# EAGLE board eg3301_pcb v11 (EAGLE 9.7.0)
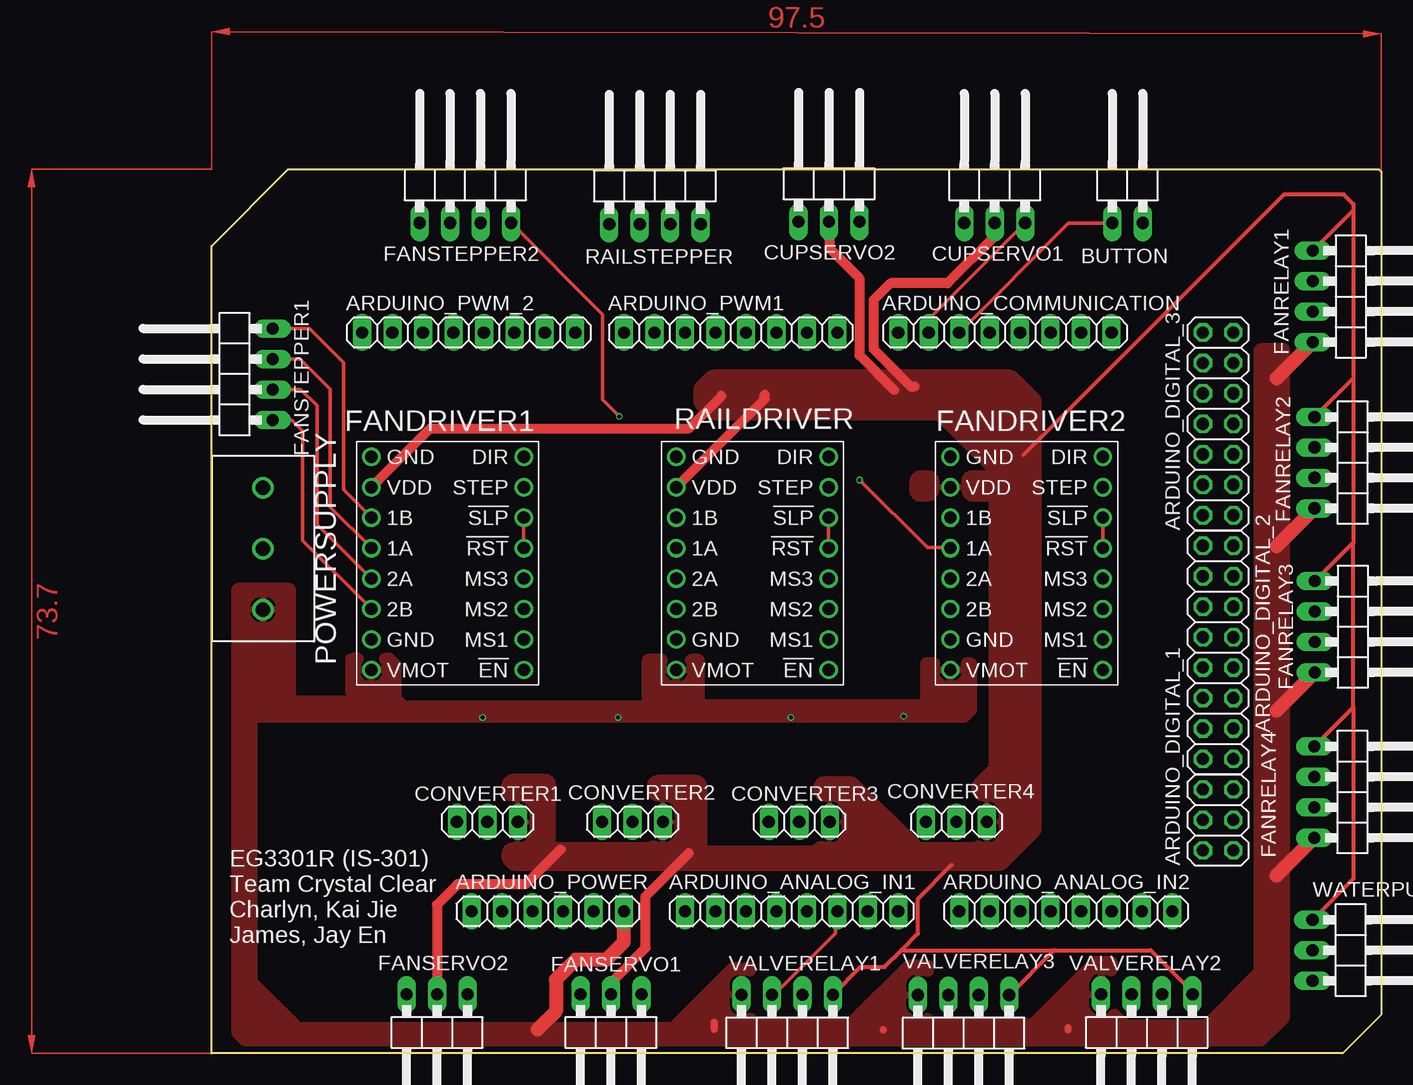
[diagram p0: board, top side]
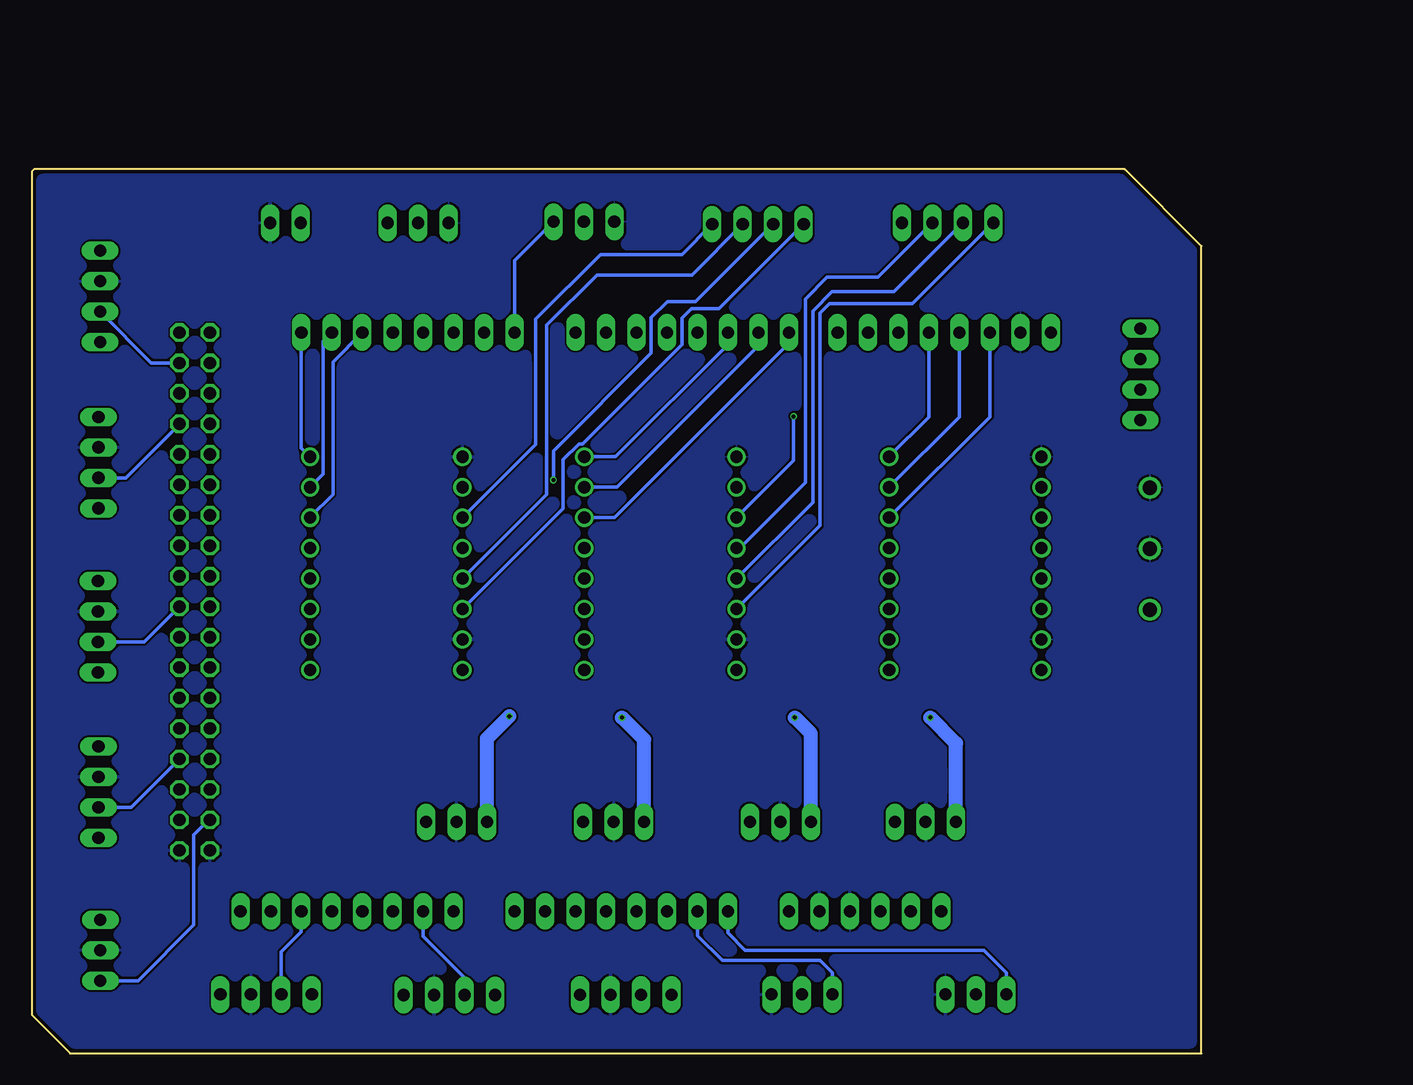
[diagram p1: board, bottom side, seen from below]

Size 97.5 x 73.7 mm. Coordinates in mm from the lower left corner, seen from the top.
Outline: 97.5,73.5 97.5,3.2 94.3,0 0,0 0,67.3 6.4,73.7 97.3,73.7 97.5,73.5
Copper layers (1*16): Top / Bottom
Stack-up Default Layer Stack: Top User Defined 0.035mm / Dielectric-1 User Defined 1.5mm / Bottom User Defined 0.035mm
Design rules: minimum copper width 6mil, minimum drill size 0.3mm, copper clearance wire_polygon to wire_polygon 6mil, copper clearance wire_polygon to pad_smd 6mil, copper clearance wire_polygon to via 6mil, copper clearance pad_smd to pad_smd 6mil, copper clearance pad_smd to via 6mil, copper clearance via to via 6mil, copper clearance smd to pad (same net) 0mil, copper clearance smd to via (same net) 0mil, copper clearance smd to smd (same net) 0mil, dimension clearance 0.3mm, via restrict clearance 0mil, restrict clearance 0mil, drill distance 10mil, keepout clearance 0mil

## Footprints (pad centres in the part's own frame; a part is rotated, then mirrored left to right if it is on the bottom)
1X08 = drill 1.016 long: 1 -8.89,0; 2 -6.35,0; 3 -3.81,0; 4 -1.27,0; 5 1.27,0; 6 3.81,0; 7 6.35,0; 8 8.89,0
2X03 = drill 1.016 octagon: 1 -2.54,-1.27; 2 -2.54,1.27; 3 0,-1.27; 4 0,1.27; 5 2.54,-1.27; 6 2.54,1.27
2X08 = drill 1.016 octagon: 1 -8.89,-1.27; 2 -8.89,1.27; 3 -6.35,-1.27; 4 -6.35,1.27; 5 -3.81,-1.27; 6 -3.81,1.27; 7 -1.27,-1.27; 8 -1.27,1.27; 9 1.27,-1.27; 10 1.27,1.27; 11 3.81,-1.27; 12 3.81,1.27; 13 6.35,-1.27; 14 6.35,1.27; 15 8.89,-1.27; 16 8.89,1.27
2X07 = drill 1.016 octagon: 1 -7.62,-1.27; 2 -7.62,1.27; 3 -5.08,-1.27; 4 -5.08,1.27; 5 -2.54,-1.27; 6 -2.54,1.27; 7 0,-1.27; 8 0,1.27; 9 2.54,-1.27; 10 2.54,1.27; 11 5.08,-1.27; 12 5.08,1.27; 13 7.62,-1.27; 14 7.62,1.27
1X06 = drill 1.016 long: 1 -6.35,0; 2 -3.81,0; 3 -1.27,0; 4 1.27,0; 5 3.81,0; 6 6.35,0
1X02/90 = drill 1.016 long: 1 -1.27,-3.81; 2 1.27,-3.81
1X03 = drill 1.016 long: 1 -2.54,0; 2 0,0; 3 2.54,0
1X03/90 = drill 1.016 long: 1 -2.54,-3.81; 2 0,-3.81; 3 2.54,-3.81
A4988 = drill 1.016: 1 -6.35,8.89; 2 -6.35,6.35; 3 -6.35,3.81; 4 -6.35,1.27; 5 -6.35,-1.27; 6 -6.35,-3.81; 7 -6.35,-6.35; 8 -6.35,-8.89; 9 6.35,-8.89; 10 6.35,-6.35; 11 6.35,-3.81; 12 6.35,-1.27; 13 6.35,1.27; 14 6.35,3.81; 15 6.35,6.35; 16 6.35,8.89
1X04/90 = drill 1.016 long: 1 -3.81,-3.81; 2 -1.27,-3.81; 3 1.27,-3.81; 4 3.81,-3.81
TERMBLK_508-3N = drill 1.2: 1 0,0; 2 5.08,0; 3 10.16,0

## Placement (x,y rotation side)
ARDUINO_ANALOG_IN1  PINHD-1X8  [1X08]  48.36,11.84 0 top
ARDUINO_ANALOG_IN2  PINHD-1X8  [1X08]  71.22,11.84 0 top
ARDUINO_COMMUNICATION  PINHD-1X8  [1X08]  66.14,60.1 0 top
ARDUINO_DIGITAL_1  PINHD-2X3  [2X03]  83.92,19.46 90 top
ARDUINO_DIGITAL_2  PINHD-2X8  [2X08]  83.92,33.43 90 top
ARDUINO_DIGITAL_3  PINHD-2X7  [2X07]  83.92,52.48 90 top
ARDUINO_POWER  PINHD-1X6  [1X06]  28.04,11.84 0 top
ARDUINO_PWM1  PINHD-1X8  [1X08]  43.28,60.1 0 top
ARDUINO_PWM_2  PINHD-1X8  [1X08]  21.43,60.1 0 top
BUTTON  PINHD-1X2/90  [1X02/90]  76.36,73.04 0 top
CONVERTER1  PINHD-1X3  [1X03]  23,19.3 0 top
CONVERTER2  PINHD-1X3  [1X03]  35.1,19.3 0 top
CONVERTER3  PINHD-1X3  [1X03]  49,19.3 0 top
CONVERTER4  PINHD-1X3  [1X03]  62.1,19.3 0 top
CUPSERVO1  PINHD-1X3/90  [1X03/90]  65.29,73.04 0 top
CUPSERVO2  PINHD-1X3/90  [1X03/90]  51.48,73.14 0 top
FANDRIVER1  1182-A4988  [A4988]  19.68,40.85 180 top
FANDRIVER2  1182-A4988  [A4988]  67.95,40.85 180 top
FANRELAY1  PINHD-1X4/90  [1X04/90]  95.62,63.1 270 top
FANRELAY2  PINHD-1X4/90  [1X04/90]  95.76,49.25 270 top
FANRELAY3  PINHD-1X4/90  [1X04/90]  95.79,35.57 270 top
FANRELAY4  PINHD-1X4/90  [1X04/90]  95.75,21.78 270 top
FANSERVO1  PINHD-1X3/90  [1X03/90]  33.3,1.1 180 top
FANSERVO2  PINHD-1X3/90  [1X03/90]  18.8,1.1 180 top
FANSTEPPER1  PINHD-1X4/90  [1X04/90]  1.28,56.62 90 top
FANSTEPPER2  PINHD-1X4/90  [1X04/90]  21.16,73.05 0 top
POWERSUPPLY  2828XX-3282837-3  [TERMBLK_508-3N]  4.3,37 90 top
RAILDRIVER  1182-A4988  [A4988]  45.1,40.85 180 top
RAILSTEPPER  PINHD-1X4/90  [1X04/90]  36.97,72.94 0 top
VALVERELAY1  PINHD-1X4/90  [1X04/90]  47.99,1.08 180 top
VALVERELAY2  PINHD-1X4/90  [1X04/90]  77.97,1.1 180 top
VALVERELAY3  PINHD-1X4/90  [1X04/90]  62.69,1.05 180 top
WATERPUMPRELAY  PINHD-1X3/90  [1X03/90]  95.6,8.6 270 top

## Library data of the parts
ARDUINO_ANALOG_IN1 ARDUINO_ANALOG_IN2 ARDUINO_COMMUNICATION ARDUINO_PWM1 ARDUINO_PWM_2 = Connector; CATEGORY: Headers; DESCRIPTION: Header, Straight, 8 Position; MANUFACTURER: Generic; MPN: Generic; OPERATING_TEMPERATURE: Generic; PART_STATUS: Active; PITCH: 0.100" (2.54mm); ROHS_COMPLIANCE: Generic; SERIES: Generic; SUB-CATEGORY: Headers, Male Pins; TYPE: Board to Board or Cable, Unshrouded, Through Hole, Straight
ARDUINO_DIGITAL_1 = Connector; CATEGORY: Headers; DESCRIPTION: Header, Straight, 2x3 Position; MANUFACTURER: Generic; MPN: Generic; OPERATING_TEMPERATURE: Generic; PART_STATUS: Active; PITCH: 0.100" (2.54mm); ROHS_COMPLIANCE: Generic; SERIES: Generic; SUB-CATEGORY: Headers, Male Pins; TYPE: Board to Board or Cable, Unshrouded, Through Hole, Straight
ARDUINO_DIGITAL_2 = Connector; CATEGORY: Headers; DESCRIPTION: Header, Straight, 2x8 Position; MANUFACTURER: Generic; MPN: Generic; OPERATING_TEMPERATURE: Generic; PART_STATUS: Active; PITCH: 0.100" (2.54mm); ROHS_COMPLIANCE: Generic; SERIES: Generic; SUB-CATEGORY: Headers, Male Pins; TYPE: Board to Board or Cable, Unshrouded, Through Hole, Straight
ARDUINO_DIGITAL_3 = Connector; CATEGORY: Headers; DESCRIPTION: Header, Straight, 2x7 Position; MANUFACTURER: Generic; MPN: Generic; OPERATING_TEMPERATURE: Generic; PART_STATUS: Active; PITCH: 0.100" (2.54mm); ROHS_COMPLIANCE: Generic; SERIES: Generic; SUB-CATEGORY: Headers, Male Pins; TYPE: Board to Board or Cable, Unshrouded, Through Hole, Straight
ARDUINO_POWER = Connector; CATEGORY: Headers; DESCRIPTION: Header, Straight, 6 Position; MANUFACTURER: Generic; MPN: Generic; OPERATING_TEMPERATURE: Generic; PART_STATUS: Active; PITCH: 0.100" (2.54mm); ROHS_COMPLIANCE: Generic; SERIES: Generic; SUB-CATEGORY: Headers, Male Pins; TYPE: Board to Board or Cable, Unshrouded, Through Hole, Straight
BUTTON = Connector; CATEGORY: Headers; DESCRIPTION: Header, Right Angle, 2 Position; MANUFACTURER: Generic; MPN: Generic; OPERATING_TEMPERATURE: Generic; PART_STATUS: Active; PITCH: 0.100" (2.54mm); ROHS_COMPLIANCE: Generic; SERIES: Generic; SUB-CATEGORY: Headers, Male Pins; TYPE: Board to Board or Cable, Unshrouded, Through Hole, Right Angle
CONVERTER1-CONVERTER4 = Connector; CATEGORY: Headers; DESCRIPTION: Header, Straight, 3 Position; MANUFACTURER: Generic; MPN: Generic; OPERATING_TEMPERATURE: Generic; PART_STATUS: Active; PITCH: 0.100" (2.54mm); ROHS_COMPLIANCE: Generic; SERIES: Generic; SUB-CATEGORY: Headers, Male Pins; TYPE: Board to Board or Cable, Unshrouded, Through Hole, Straight
CUPSERVO1 CUPSERVO2 FANSERVO1 FANSERVO2 WATERPUMPRELAY = Connector; CATEGORY: Headers; DESCRIPTION: Header, Right Angle, 3 Position; MANUFACTURER: Generic; MPN: Generic; OPERATING_TEMPERATURE: Generic; PART_STATUS: Active; PITCH: 0.100" (2.54mm); ROHS_COMPLIANCE: Generic; SERIES: Generic; SUB-CATEGORY: Headers, Male Pins; TYPE: Board to Board or Cable, Unshrouded, Through Hole, Right Angle
FANDRIVER1 FANDRIVER2 RAILDRIVER = pololu-stepper-driver
FANRELAY1-FANRELAY4 FANSTEPPER1 FANSTEPPER2 RAILSTEPPER VALVERELAY1-VALVERELAY3 = Connector; CATEGORY: Headers; DESCRIPTION: Header, Right Angle, 4 Position; MANUFACTURER: Generic; MPN: Generic; OPERATING_TEMPERATURE: Generic; PART_STATUS: Active; PITCH: 0.100" (2.54mm); ROHS_COMPLIANCE: Generic; SERIES: Generic; SUB-CATEGORY: Headers, Male Pins; TYPE: Board to Board or Cable, Unshrouded, Through Hole, Right Angle
POWERSUPPLY = Connector; CATEGORY: Connector; DESCRIPTION: TERM BLK 3P SIDE ENT 5.08mm PCB; MANUFACTURER: TE Connectivity; MPN: 282837-3; OPERATING_TEMPERATURE: -40°C to +105°C; PART_STATUS: Active; PITCH: 0.200" (5.08mm); ROHS_COMPLIANCE: RoHS Compliant; SERIES: Buchanan; SUBCATEGORY: Terminal Block; TYPE: Side Wire Entry

## Nets
1A_1: FANDRIVER1.12 FANSTEPPER1.3
1A_2: FANSTEPPER2.3 RAILDRIVER.12
1A_3: FANDRIVER2.12 RAILSTEPPER.2
1B_1: FANDRIVER1.11 FANSTEPPER1.4
1B_2: FANSTEPPER2.4 RAILDRIVER.11
1B_3: FANDRIVER2.11 RAILSTEPPER.4
2A_1: FANDRIVER1.13 FANSTEPPER1.2
2A_2: FANSTEPPER2.2 RAILDRIVER.13
2A_3: FANDRIVER2.13 RAILSTEPPER.3
2B_1: FANDRIVER1.14 FANSTEPPER1.1
2B_2: FANSTEPPER2.1 RAILDRIVER.14
2B_3: FANDRIVER2.14 RAILSTEPPER.1
3.3V: ARDUINO_POWER.2
5V: CONVERTER1.3 CONVERTER2.3 CONVERTER3.3 CONVERTER4.3 CUPSERVO1.2 CUPSERVO2.2 FANDRIVER1.10 FANDRIVER2.10 FANRELAY1.1 FANRELAY2.1 FANRELAY3.1 FANRELAY4.1 FANSERVO1.2 FANSERVO2.2 RAILDRIVER.10 VALVERELAY1.1 VALVERELAY2.1 VALVERELAY3.1 WATERPUMPRELAY.1
12V: ARDUINO_POWER.6 CONVERTER1.1 CONVERTER2.1 CONVERTER3.1 CONVERTER4.1 FANDRIVER1.16 FANDRIVER2.16 FANRELAY1.4 FANRELAY2.4 FANRELAY3.4 FANRELAY4.4 POWERSUPPLY.1 RAILDRIVER.16 VALVERELAY1.4 VALVERELAY2.4 VALVERELAY3.4
!EN_1: FANDRIVER1.1
!EN_2: RAILDRIVER.1
!EN_3: FANDRIVER2.1
A0: ARDUINO_ANALOG_IN1.1 FANSERVO2.3
A1: ARDUINO_ANALOG_IN1.2 FANSERVO1.3
A2: ARDUINO_ANALOG_IN1.3
A3: ARDUINO_ANALOG_IN1.4
A4: ARDUINO_ANALOG_IN1.5
A5: ARDUINO_ANALOG_IN1.6 VALVERELAY1.3
A6: ARDUINO_ANALOG_IN1.7
A7: ARDUINO_ANALOG_IN1.8
A8: ARDUINO_ANALOG_IN2.1
A9: ARDUINO_ANALOG_IN2.2 VALVERELAY3.3
A10: ARDUINO_ANALOG_IN2.3
A11: ARDUINO_ANALOG_IN2.4
A12: ARDUINO_ANALOG_IN2.5
A13: ARDUINO_ANALOG_IN2.6 VALVERELAY2.3
A14: ARDUINO_ANALOG_IN2.7
A15: ARDUINO_ANALOG_IN2.8
ARDUINO5V: ARDUINO_DIGITAL_3.13
AREF: ARDUINO_PWM_2.1
D0: ARDUINO_PWM1.8
D1: ARDUINO_PWM1.7
D2: ARDUINO_PWM1.6
D3: ARDUINO_PWM1.5
D4: ARDUINO_PWM1.4
D5: ARDUINO_PWM1.3 RAILDRIVER.8
D6: ARDUINO_PWM1.2 RAILDRIVER.7
D7: ARDUINO_PWM1.1 RAILDRIVER.5 RAILDRIVER.6
D8: ARDUINO_PWM_2.8
D9: ARDUINO_PWM_2.7
D10: ARDUINO_PWM_2.6
D11: ARDUINO_PWM_2.5 FANDRIVER1.8
D12: ARDUINO_PWM_2.4 FANDRIVER1.7
D13: ARDUINO_PWM_2.3 FANDRIVER1.5 FANDRIVER1.6
D14: ARDUINO_COMMUNICATION.1 CUPSERVO2.3
D15: ARDUINO_COMMUNICATION.2 CUPSERVO1.3
D16: ARDUINO_COMMUNICATION.3 BUTTON.1
D17: ARDUINO_COMMUNICATION.4
D18: ARDUINO_COMMUNICATION.5
D19: ARDUINO_COMMUNICATION.6 FANDRIVER2.5 FANDRIVER2.6
D20: ARDUINO_COMMUNICATION.7 FANDRIVER2.7
D21: ARDUINO_COMMUNICATION.8 FANDRIVER2.8
D22: ARDUINO_DIGITAL_3.12
D23: ARDUINO_DIGITAL_3.11 FANRELAY1.3
D24: ARDUINO_DIGITAL_3.10
D25: ARDUINO_DIGITAL_3.9
D26: ARDUINO_DIGITAL_3.8
D27: ARDUINO_DIGITAL_3.7 FANRELAY2.3
D28: ARDUINO_DIGITAL_3.6
D29: ARDUINO_DIGITAL_3.5
D30: ARDUINO_DIGITAL_3.4
D31: ARDUINO_DIGITAL_3.3
D32: ARDUINO_DIGITAL_3.2
D33: ARDUINO_DIGITAL_3.1
D34: ARDUINO_DIGITAL_2.16
D35: ARDUINO_DIGITAL_2.15
D36: ARDUINO_DIGITAL_2.14
D37: ARDUINO_DIGITAL_2.13
D38: ARDUINO_DIGITAL_2.12
D39: ARDUINO_DIGITAL_2.11 FANRELAY3.3
D40: ARDUINO_DIGITAL_2.10
D41: ARDUINO_DIGITAL_2.9
D42: ARDUINO_DIGITAL_2.8
D43: ARDUINO_DIGITAL_2.7
D44: ARDUINO_DIGITAL_2.6
D45: ARDUINO_DIGITAL_2.5
D46: ARDUINO_DIGITAL_2.4
D47: ARDUINO_DIGITAL_2.3
D48: ARDUINO_DIGITAL_2.2
D49: ARDUINO_DIGITAL_2.1 FANRELAY4.3
D50: ARDUINO_DIGITAL_1.6
D51: ARDUINO_DIGITAL_1.5
D52: ARDUINO_DIGITAL_1.4 WATERPUMPRELAY.3
D53: ARDUINO_DIGITAL_1.3
GND: ARDUINO_DIGITAL_1.1 ARDUINO_DIGITAL_1.2 ARDUINO_POWER.4 ARDUINO_POWER.5 ARDUINO_PWM_2.2 BUTTON.2 CONVERTER1.2 CONVERTER2.2 CONVERTER3.2 CONVERTER4.2 CUPSERVO1.1 CUPSERVO2.1 FANDRIVER1.9 FANDRIVER1.15 FANDRIVER2.9 FANDRIVER2.15 FANRELAY1.2 FANRELAY2.2 FANRELAY3.2 FANRELAY4.2 FANSERVO1.1 FANSERVO2.1 POWERSUPPLY.2 POWERSUPPLY.3 RAILDRIVER.9 RAILDRIVER.15 VALVERELAY1.2 VALVERELAY2.2 VALVERELAY3.2 WATERPUMPRELAY.2
MS1_1: FANDRIVER1.2
MS1_2: RAILDRIVER.2
MS1_3: FANDRIVER2.2
MS2_1: FANDRIVER1.3
MS2_2: RAILDRIVER.3
MS2_3: FANDRIVER2.3
MS3_1: FANDRIVER1.4
MS3_2: RAILDRIVER.4
MS3_3: FANDRIVER2.4
RESET: ARDUINO_POWER.1

## Tracks (layer width: path | path; a pad name or v marks a point on that pad's centre or on a via)
1A_1
  Top 0.305: FANSTEPPER1.3 7.4,57.9 9.9,55.4 9.9,45.55 FANDRIVER1.12
1A_2
  Bottom 0.305: FANSTEPPER2.3 26.97,64.7 31.2,64.7 33,62.9 33,47.6 38.48,42.12 RAILDRIVER.12
1A_3  (via drill 0.35)
  Top 0.305: FANDRIVER2.12 61.64,42.16 59.66,42.16 v54.02,47.8
  Bottom 0.305: RAILSTEPPER.2 42.16,62.67 44.53,62.67 45.86,61.34 45.86,58.37 54.02,50.21 v54.02,47.8
1B_1
  Top 0.305: FANSTEPPER1.4 8.17,60.43 11,57.6 11,46.99 FANDRIVER1.11
1B_2  (via drill 0.35)
  Top 0.305: FANSTEPPER2.4 32.6,61.61 32.6,54.5 v34,53.1
  Bottom 0.305: v34,53.1 34,49.41 RAILDRIVER.11
1B_3
  Bottom 0.305: RAILSTEPPER.4 43.31,66.6 50.1,66.6 55.5,61.2 55.5,50.76 FANDRIVER2.11
2A_1
  Top 0.305: FANSTEPPER1.2 7.45,55.35 8.8,54 8.8,44.1 FANDRIVER1.13
2A_2
  Bottom 0.305: FANSTEPPER2.2 25.63,63.5 30.8,63.5 32.4,61.9 32.4,45.93 RAILDRIVER.13
2A_3
  Bottom 0.305: RAILSTEPPER.3 42.47,64.9 50.4,64.9 54.6,60.7 54.6,46.58 FANDRIVER2.13
2B_1
  Top 0.305: FANSTEPPER1.1 6.69,52.81 7.6,51.9 7.6,42.77 FANDRIVER1.14
2B_2
  Bottom 0.305: FANSTEPPER2.1 24.09,62.5 31,62.5 31.8,61.7 31.8,43.99 RAILDRIVER.14
2B_3
  Bottom 0.305: RAILSTEPPER.1 40.22,62.07 42.49,62.07 43.28,61.28 43.28,59.1 51.57,50.81 51.89,50.81 53.2,49.5 53.2,45.44 FANDRIVER2.14
5V
  Top 0.32: 67.7,49.9 89.4,71.6 94.4,71.6 95.2,70.8 95.2,70.3 | 95.2,28.85 95.2,42.6 | FANRELAY4.1 95.2,28.85 | FANRELAY3.1 95.2,42.6 | 95.2,70.3 95.2,56.31 | 95.2,56.31 95.2,42.6 | FANRELAY2.1 95.2,56.31 | FANRELAY1.1 95.2,70.3 | VALVERELAY1.1 54.11,7.2 56.1,7.2 57.5,8.6 | 57.5,8.6 70.24,8.6 | 70.24,8.6 78.3,8.6 81.78,5.12 VALVERELAY2.1 | 57.5,8.6 58.9,10 58.9,12.9 61.7,15.7 | VALVERELAY3.1 70.24,8.6 | 95.2,28.85 95.2,14.55 WATERPUMPRELAY.1
  Top 0.813: 56.9,55.3 54,58.2 54,64.62 51.5,67.12 51.5,69.31 CUPSERVO2.2 | CUPSERVO1.2 65.29,68.13 61.36,64.2 56.6,64.2 55.2,62.8 55.2,58.7 58.3,55.6 58.6,55.6 | RAILDRIVER.10 46.1,54.55 46.1,54.9 | FANDRIVER1.10 18.23,52.1 39.8,52.1 42.5,54.8 | FANSERVO2.2 18.8,12.4 20.5,14.1 26.2,14.1 29.1,17 | FANSERVO1.2 33.3,5.9 36.2,8.8 36.2,13.1 39.8,16.7
  pour Top: 24.2,23.3 24.2,16 25,15.2 66,15.2 69.2,18.4 69.2,54.7 66.9,57 41.5,57 40.2,55.7 40.2,54 41.4,52.8 60.4,52.8 64.6,48.6 58.2,48.6 58.2,46 64.8,46 64.8,24 63.4,22.6 63.4,17.6 59.1,17.6 53.6,23.1 50.2,23.1 50.2,17.4 50.1,17.3 41.3,17.3 41.3,23.2 36.3,23.2 36.3,17.6 28.7,17.6 28.7,23.3
12V  (via drill 0.35)
  Top 0.574: 71.4,2.15 71.4,1.94 | 41.9,2.61 41.9,1.99 | 56,1.98 56,1.94
  Top 1.16: 27.2,2 28.72,3.52 28.72,6.17 30.36,7.81 32.9,7.81 34.39,9.3 ARDUINO_POWER.6 | FANRELAY1.4 88.8,56.28 | FANRELAY2.4 88.8,42.29 | FANRELAY3.4 88.8,28.58 | FANRELAY4.4 88.8,14.83
  Bottom 1.16: CONVERTER1.1 20.46,25.86 v22.6,28 | CONVERTER2.1 32.56,26.66 v33.9,28 | CONVERTER3.1 46.46,26.16 v48.3,28 | CONVERTER4.1 59.56,26.24 v57.7,28.1
  pour Top: 1.7,39.2 1.7,1.5 2.6,0.6 87.7,0.6 89.9,2.8 89.9,59 89.7,59.2 87.3,59.2 86.9,58.8 86.9,7 82.7,2.8 76.4,2.8 75.5,3.7 75.5,8.1 73.5,8.1 68.3,2.9 60.2,2.9 60.2,7.8 57.9,7.8 53,2.9 45.6,2.9 45.4,3.1 45.4,7.4 45.2,7.6 43.3,7.6 38.3,2.6 7.4,2.6 3.8,6.2 3.8,27.6 63,27.6 63.8,28.4 63.8,33 59.1,33 59.1,29.5 41.2,29.5 41.1,29.6 41.1,33.1 40.9,33.3 36.2,33.3 35.9,33 35.9,29.4 16.2,29.4 15.8,29.8 15.8,32.6 15,33.4 11.2,33.4 11.2,29.9 11.3,29.8 7,29.8 7,39.2
A0
  Bottom 0.305: FANSERVO2.3 16.26,6.71 18.15,8.6 38.03,8.6 39.47,10.04 ARDUINO_ANALOG_IN1.1
A1
  Bottom 0.305: FANSERVO1.3 30.76,6.71 31.79,7.74 39.94,7.74 42.01,9.81 ARDUINO_ANALOG_IN1.2
A5
  Top 0.305: VALVERELAY1.3 47,5 52,10 52,11.5 ARDUINO_ANALOG_IN1.6
A9
  Bottom 0.305: VALVERELAY3.3 61.42,6.29 64.87,9.74 ARDUINO_ANALOG_IN2.2
A13
  Bottom 0.305: VALVERELAY2.3 76.7,8.47 75.03,10.14 ARDUINO_ANALOG_IN2.6
D5
  Bottom 0.305: ARDUINO_PWM1.3 39.47,59.1 48.83,49.74 RAILDRIVER.8
D6
  Bottom 0.305: ARDUINO_PWM1.2 36.93,59 48.73,47.2 RAILDRIVER.7
D7
  Top 0.305: RAILDRIVER.6 RAILDRIVER.5
  Bottom 0.305: ARDUINO_PWM1.1 34.39,59.2 48.93,44.66 RAILDRIVER.6
D11
  Bottom 0.305: ARDUINO_PWM_2.5 22.7,53.06 FANDRIVER1.8
D12
  Bottom 0.305: ARDUINO_PWM_2.4 20.16,53.06 FANDRIVER1.7
D13
  Top 0.305: FANDRIVER1.6 FANDRIVER1.5
  Bottom 0.305: ARDUINO_PWM_2.3 17.62,53.06 FANDRIVER1.6
D14
  Bottom 0.305: ARDUINO_COMMUNICATION.1 57.25,66.1 CUPSERVO2.3
D15
  Top 0.305: CUPSERVO1.3 67.8,69.21 59.79,61.2 ARDUINO_COMMUNICATION.2
D16
  Top 0.305: BUTTON.1 75.08,69.21 71.44,69.21 ARDUINO_COMMUNICATION.3
D19
  Top 0.305: FANDRIVER2.5 FANDRIVER2.6
  Bottom 0.305: ARDUINO_COMMUNICATION.6 72.4,57.65 72.4,46.6 74.3,44.7 FANDRIVER2.6
D20
  Bottom 0.305: ARDUINO_COMMUNICATION.7 73.2,59.39 73.2,48.3 FANDRIVER2.7
D21
  Bottom 0.305: ARDUINO_COMMUNICATION.8 75.03,50.47 FANDRIVER2.8
D23
  Bottom 0.305: FANRELAY1.3 87.54,57.56 ARDUINO_DIGITAL_3.11
D27
  Bottom 0.305: FANRELAY2.3 89.69,47.98 ARDUINO_DIGITAL_3.7
D39
  Bottom 0.305: FANRELAY3.3 88.13,34.3 ARDUINO_DIGITAL_2.11
D49
  Bottom 0.305: FANRELAY4.3 89.22,20.51 ARDUINO_DIGITAL_2.1
D52
  Bottom 0.305: ARDUINO_DIGITAL_1.4 82.74,19.46 84,18.2 84,10.7 88.64,6.06 WATERPUMPRELAY.3
GND
  pour Bottom: 0,0 97.5,0 97.5,73.7 0,73.7 0,73.6 0,73.7
  pour Bottom: 70.5,73.4 96.8,73.4 97.1,73.1 97.1,3.5 93.9,0.3 93.9,0.2 0.2,0.2 0.2,3.1
(copper drawn outside any net)
  shapes: Top area x2

## Text on the board
tPlace: EG3301R (IS-301) / Team Crystal Clear / Charlyn, Kai Jie / James, Jay En